# EAGLE board 4017-7Segment (EAGLE 7.6.0)

Size 38 x 65 mm. Coordinates in mm from the lower left corner, seen from the top.
Outline: 0,0 38,0 38,65 0,65 0,0
Copper layers (1*16): Top 0.035mm / dielectric 1.5mm / Bottom 0.035mm
Design rules "default": minimum track width 10mil, minimum drill 24mil, track to track 8mil, track to pad 8mil, pad to pad 8mil, via to via 8mil, smd to smd 8mil, copper to edge 40mil, drill to drill 8mil, minimum pad ring 10mil, minimum via ring 8mil, stop-mask expansion 4mil, vias tented up to drill 0mil, thermal gap 10mil

## Footprints (pad centres in the part's own frame; a part is rotated, then mirrored left to right if it is on the bottom)
DIL16 = drill 0.813 long: 1 -8.89,-3.81; 2 -6.35,-3.81; 3 -3.81,-3.81; 4 -1.27,-3.81; 5 1.27,-3.81; 6 3.81,-3.81; 7 6.35,-3.81; 8 8.89,-3.81; 9 8.89,3.81; 10 6.35,3.81; 11 3.81,3.81; 12 1.27,3.81; 13 -1.27,3.81; 14 -3.81,3.81; 15 -6.35,3.81; 16 -8.89,3.81
DO35Z10 = drill 0.813 long: A 5.08,0; C -5.08,0
1X04 = drill 1.016 long: 1 -3.81,0; 2 -1.27,0; 3 1.27,0; 4 3.81,0
R1206 = smd 1.6 x 1.803: 1 -1.422,0; 2 1.422,0
7-SEGMENT-DISPLAY = drill 0.65 pad 1.88: 1 -5.08,-7.62; 2 -2.54,-7.62; 3 0,-7.62; 4 2.54,-7.62; 5 5.08,-7.62; 6 5.08,7.62; 7 2.54,7.62; 8 0,7.62; 9 -2.54,7.62; 10 -5.08,7.62

## Placement (x,y rotation side)
4017BE  CD4017  [DIL16]  7,28 270 top
D_0__SEG_DA  1N821  [DO35Z10]  30.5,58 0 top
D_0__SEG_DF  1N821  [DO35Z10]  30.5,61.5 0 top
D_1__SEG_DA  1N821  [DO35Z10]  30.5,54.5 0 top
D_1__SEG_DB  1N821  [DO35Z10]  30.5,51 0 top
D_2__SEG_DB  1N821  [DO35Z10]  30.5,47.5 0 top
D_2__SEG_DC  1N821  [DO35Z10]  30.5,44 0 top
D_3__SEG_DC  1N821  [DO35Z10]  30.5,40.5 0 top
D_3__SEG_DD  1N821  [DO35Z10]  30.5,37 0 top
D_4__SEG_DD  1N821  [DO35Z10]  30.5,33.5 0 top
D_4__SEG_DE  1N821  [DO35Z10]  30.5,30 0 top
D_5__SEG_DDP  1N821  [DO35Z10]  30.5,19.5 0 top
D_5__SEG_DE  1N821  [DO35Z10]  30.5,26.5 0 top
D_5__SEG_DF  1N821  [DO35Z10]  30.5,23 0 top
JP_CLOCK_IN  [1X04]  19.5,2 0 top
OUTPUTS  [1X04]  35.5,11 270 top
R_100O  [R1206]  9.5,9.5 270 top
U$1  7-SEGMENT-DISPLAYPTH  [7-SEGMENT-DISPLAY]  8.5,54.5 0 top

## Library data of the parts
4017BE = SparkFun-DigitalIC; PROD_ID: IC-11929
D_0__SEG_DA D_0__SEG_DF D_1__SEG_DA D_1__SEG_DB D_2__SEG_DB D_2__SEG_DC D_3__SEG_DC D_3__SEG_DD D_4__SEG_DD D_4__SEG_DE D_5__SEG_DDP D_5__SEG_DE D_5__SEG_DF = diode
JP_CLOCK_IN OUTPUTS = pinhead
R_100O = adafruit
U$1 = SparkFun-Displays

## Nets
GND: 4017BE.8 4017BE.13 JP_CLOCK_IN.1 OUTPUTS.1 R_100O.1
N$2: R_100O.2 U$1.8
P_0: 4017BE.3 D_0__SEG_DA.A D_0__SEG_DF.A
P_1: 4017BE.2 D_1__SEG_DA.A D_1__SEG_DB.A
P_2: 4017BE.4 D_2__SEG_DB.A D_2__SEG_DC.A
P_3: 4017BE.7 D_3__SEG_DC.A D_3__SEG_DD.A
P_4: 4017BE.10 D_4__SEG_DD.A D_4__SEG_DE.A
P_5: 4017BE.1 D_5__SEG_DDP.A D_5__SEG_DE.A D_5__SEG_DF.A
RESET: 4017BE.5 4017BE.15
SEG_DA: D_0__SEG_DA.C D_1__SEG_DA.C U$1.7
SEG_DB: D_1__SEG_DB.C D_2__SEG_DB.C U$1.6
SEG_DC: D_2__SEG_DC.C D_3__SEG_DC.C U$1.4
SEG_DD: D_3__SEG_DD.C D_4__SEG_DD.C U$1.2
SEG_DDP: D_5__SEG_DDP.C U$1.5
SEG_DE: D_4__SEG_DE.C D_5__SEG_DE.C U$1.1
SEG_DF: D_0__SEG_DF.C D_5__SEG_DF.C U$1.9
SEG_DG: U$1.10
TMR555_OUTPUT: 4017BE.14 JP_CLOCK_IN.3 OUTPUTS.3
TMR555_OUTPUT_REVERSE: JP_CLOCK_IN.4 OUTPUTS.4
VCC: 4017BE.16 JP_CLOCK_IN.2 OUTPUTS.2

## Tracks (layer width: path | path; a pad name or v marks a point on that pad's centre or on a via)
GND  (4 unrouted)
N$2  (1 unrouted)
P_0  (2 unrouted)
P_1  (2 unrouted)
P_2  (2 unrouted)
P_3  (2 unrouted)
P_4  (2 unrouted)
P_5  (3 unrouted)
RESET  (1 unrouted)
SEG_DA  (2 unrouted)
SEG_DB  (2 unrouted)
SEG_DC  (2 unrouted)
SEG_DD  (2 unrouted)
SEG_DDP  (1 unrouted)
SEG_DE  (2 unrouted)
SEG_DF  (2 unrouted)
TMR555_OUTPUT  (2 unrouted)
TMR555_OUTPUT_REVERSE  (1 unrouted)
VCC  (2 unrouted)

## Text on the board
tNames: Freddy's / 7 Segment Display Automation | GND | VCC | OUT | OUT_R | GND | VCC | OUT | OUT_R
bNames: MadeInTheUSB.net | PCBv2 - 2019.08